# Altium PCB PCB05072018.PcbDoc
Units mm, origin at the board's own origin, x right, y up, seen from the top; angles counter-clockwise.
Board outline 50 x 30 mm, 4 copper layers (Top Layer, L2, L3, Bottom Layer), stack 1.49 mm thick; 46 components, 32 nets, 229 pads, 161 vias.
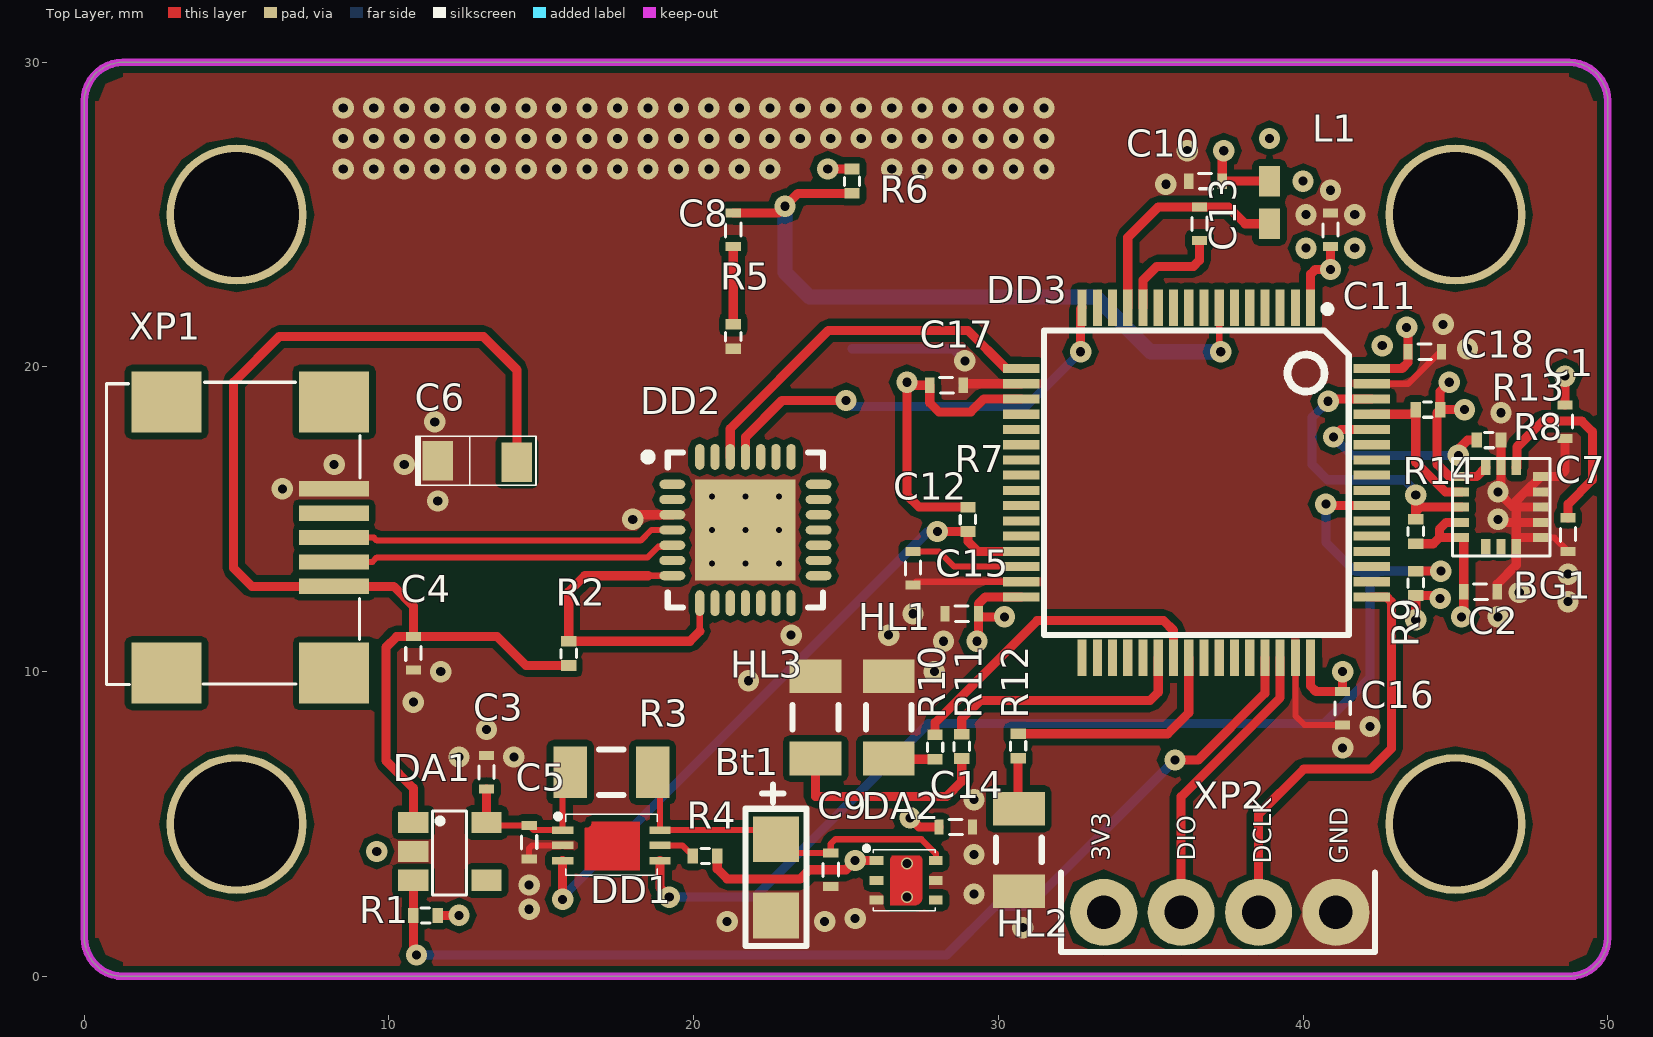
[diagram p0: Top Layer view]
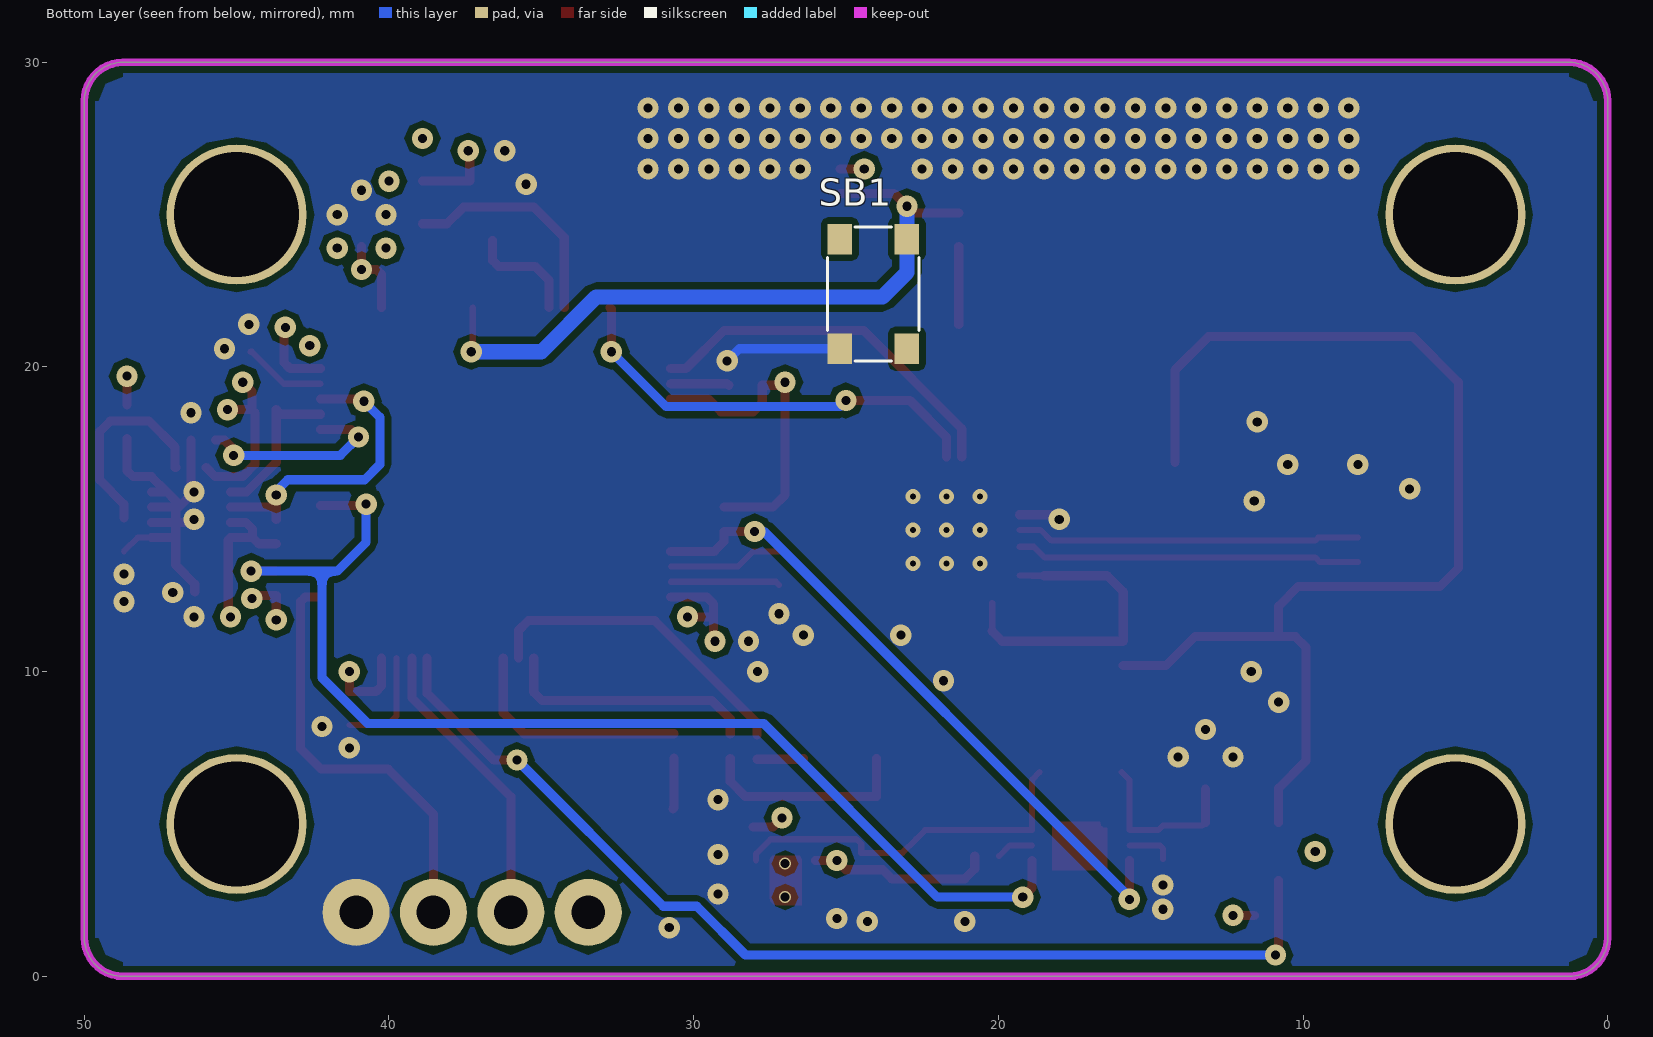
[diagram p1: Bottom Layer view, seen from below]
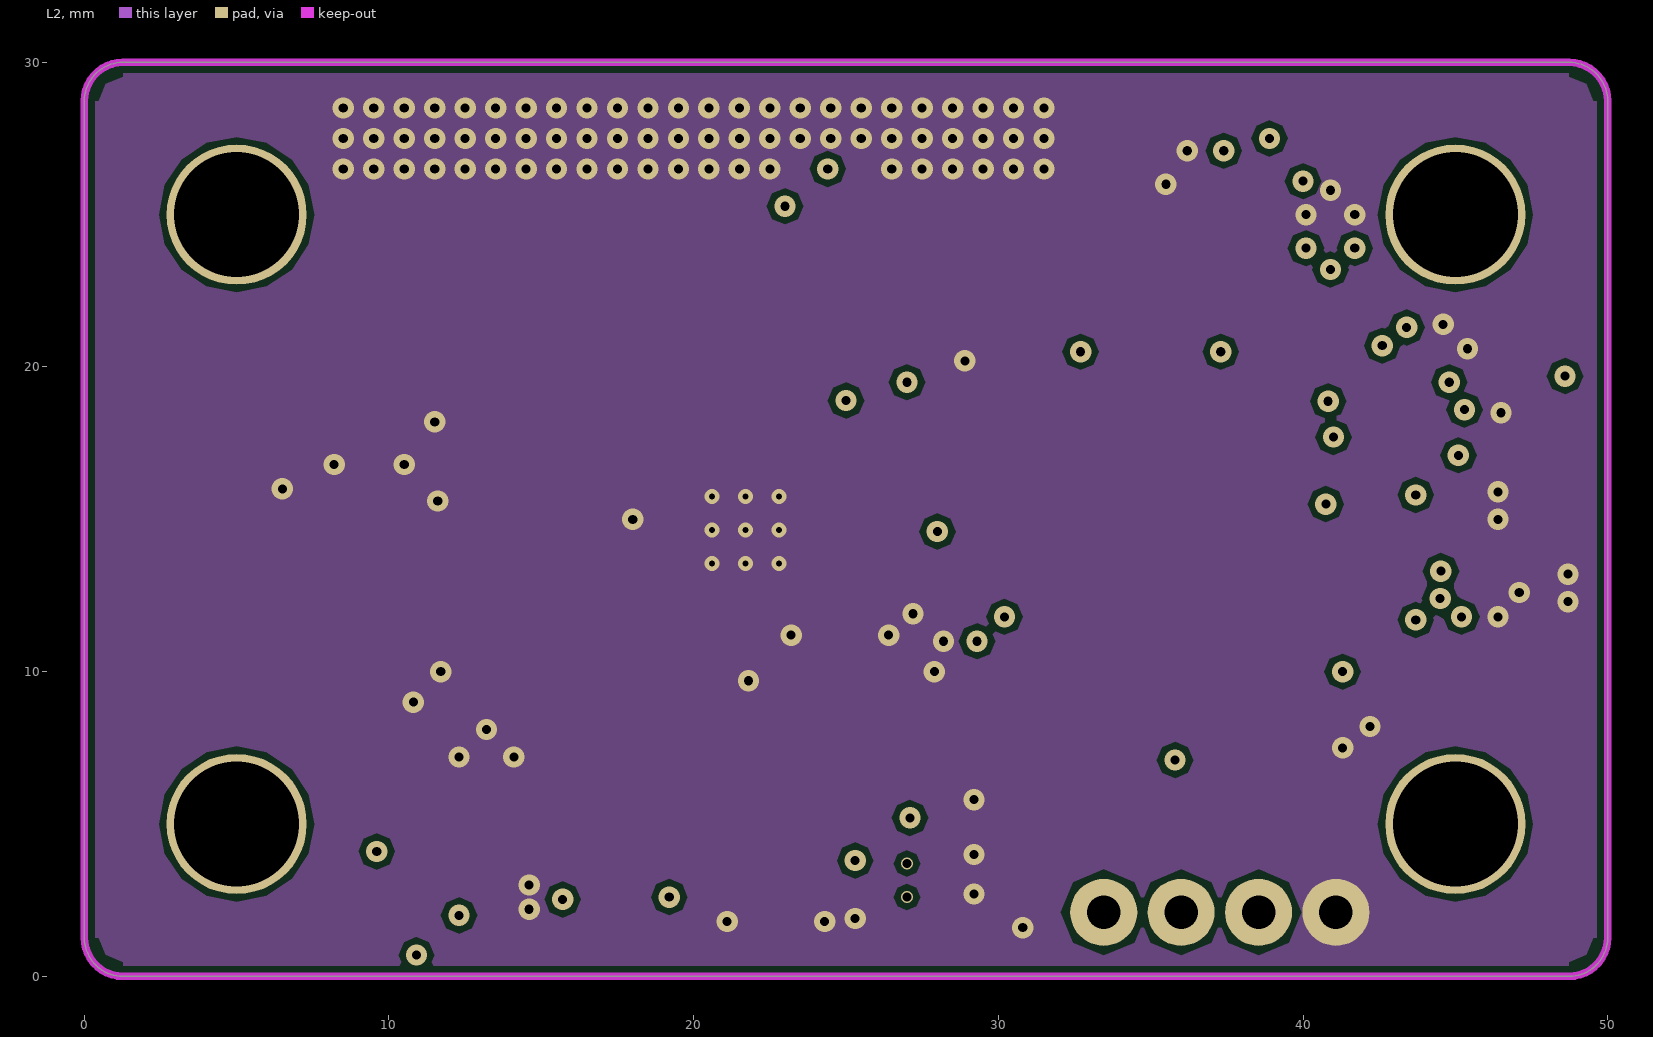
[diagram p2: L2]
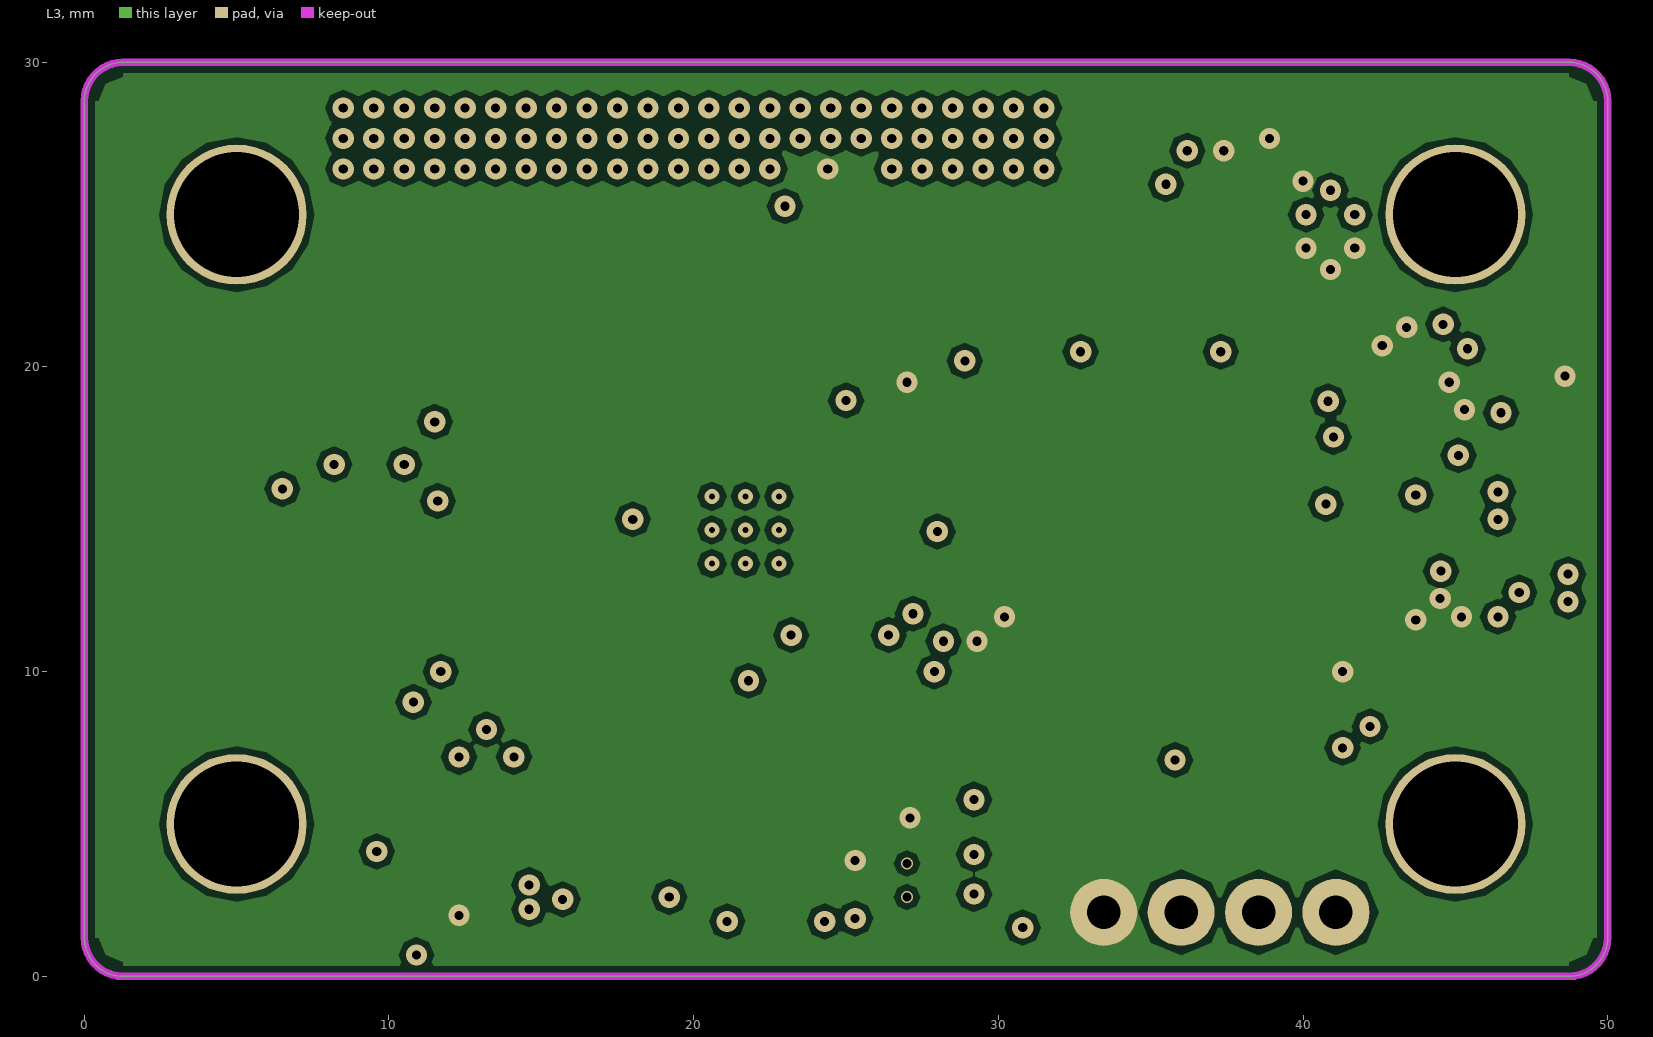
[diagram p3: L3]

## Layer stack, top to bottom
Top Solder: solder mask 0.0102, Solder Resist, Dk 3.5
Top Layer: signal copper 0.035
Dielectric 1: prepreg 0.32, FR-4, Dk 4.2
L2: signal copper 0.035
Dielectric 3: core 0.71, Dk 4.2
L3: signal copper 0.035
Dielectric 2: prepreg 0.32, Dk 4.2
Bottom Layer: signal copper 0.035
Bottom Solder: solder mask 0.0102, Solder Resist, Dk 3.5

## Board outline
1.27,0 cw(c1.27,1.27) 0,1.27 0,28.73 cw(c1.27,28.73) 1.27,30 48.73,30 cw(c48.73,28.73) 50,28.73 50,1.27 cw(c48.73,1.27) 48.73,0

## Design rules (kind name [scope] priority, off if disabled: settings)
Clearance Clearance_other [All] p1: gap=0.2 ignorepadtopadclearanceinfootprint=FALSE except(0.15: Arc-Arc Arc-Track Track-Track)
Clearance Clearance_boardLine [Keepout] p2: gap=0.75 ignorepadtopadclearanceinfootprint=FALSE
DiffPairsRouting [All] p1: maxlimit=0.35 minlimit=0.25 mostfreqgap=0.3 toplayer_minwidth=0.2 toplayer_maxwidth=0.5 toplayer_prefwidth=0.4 midlayer1_minwidth=0.2 midlayer1_maxwidth=0.5 midlayer1_prefwidth=0.4 midlayer2_minwidth=0.2 midlayer2_maxwidth=0.5 midlayer2_prefwidth=0.4 bottomlayer_minwidth=0.2 bottomlayer_maxwidth=0.5 bottomlayer_prefwidth=0.4 maxuncoupledlength=12.7
PlaneConnect PlaneConnect_interayer [InNet('+3.3V')OR InNet('GND')] p1: planeconnectstyle=Direct reliefexpansion=0.508 reliefentries=4 reliefconductorwidth=0.254 reliefairgap=0.254
PolygonConnect [InNet('+3.3V')OR InNet('GND')] p1: connectstyle=Direct reliefconductorwidth=0.254 reliefentries=4 polygonreliefangle="90 Angle" airgapwidth=0.254
RoutingVias [All] p1: holewidth=0.3 width=0.7 viastyle="Through Hole" minholewidth=0.3 minwidth=0.7 maxholewidth=0.3 maxwidth=0.7
SolderMaskExpansion [All] p1: expansion=0.102
Width [All] p1: maxlimit=5 minlimit=0.2 preferedwidth=0.5
28 further rules are at their usual default settings.

## Classes and differential pairs
differential pair USB_DifPair: +D_P -D_M

## Components (designator, comment, footprint, x,y, rotation, side; value= is the part's Value field where it differs from the comment)
BG1 "LSM6DS0" LGA-16 45.2,15.4 r90 top
Bt1 "X5HW" X5HW 22.7,4.5 r270 top value="3,7 В 1200 мАч"
C1 "0.1 uF" CAP0402_min 48.6,18.2 r270 top
C2 "10uF" CAP0402_min 45.825,12.625 r0 top
C3 "1 uF" CAP0402_min 13.2,6.7 r90 top
C4 "0.1 uF" CAP0402_min 10.8,10.6 r270 top
C5 "0.1 uF" CAP0402_min 14.6,4.4 r270 top
C6 "4.7u" "Capasitor Tantal TypeA MIN" 12.9,16.9 r180 top
C7 "0,012uF" CAP0402_min 48.7,14.5 r270 top
C8 "0.1 uF" CAP0402_min 21.3,24.5 r270 top
C9 "4.7u" CAP0402_min 24.5,3.5 r270 top
C10 "0.1 uF" CAP0402_min 36.8,26.1 r180 top
C11 "0.1 uF" CAP0402_min 40.9,24.5 r90 top
C12 "0.1 uF" CAP0402_min 27.2,13.4 r270 top
C13 "0.1 uF" CAP0402_min 36.6,24.7 r270 top
C14 "4.7u" CAP0402_min 28.6,4.9 r0 top
C15 "0.1 uF" CAP0402_min 28.8,11.9 r0 top
C16 "0.1 uF" CAP0402_min 41.3,8.8 r90 top
C17 "0.1 uF" CAP0402_min 28.3,19.4 r0 top
C18 "0.1 uF" CAP0402_min 44,20.5 r0 top
DA1 "MA1555" SOT23-5 10.8,5.05 r270 top
DA2 "TPS78230" WSON-6 26,3.8 r270 top value=3V
DD1 "LTC2941IDC" DFN-6 15.7,4.8 r270 top value=5V
DD2 "CP2102" QFN28 21.7,14.65 r0 top
DD3 "STM32F401RE" LQFP-64 36.5,16.2 r270 top
HL1 "TO-1608BC-MRE" LED1206 26.4,8.5 r90 top value=RED
HL2 "TO-1608BC-PG" LED1206 30.675,4.15 r270 top value=GREEN
HL3 "TO-1608BC-MRE" LED1206 24,8.5 r90 top value=RED
L1 "220u" LQG15HN15NJ 38.9,25.4 r270 top
R1 "10k" 0402 10.8,2 r0 top
R2 "0" 0402 15.9,10.2 r90 top
R3 "0.01" 1206 17.3,6.7 r0 top
R4 "10k" 0402 20.775,3.95 r180 top
R5 "100" 0402 21.3,20.6 r90 top
R6 "4.7k" 0402 25.2,25.7 r90 top
R7 "4.7k" 0402 29,14.6 r90 top
R8 "10k" 0402 46.5,17.6 r180 top
R9 "4.7k" 0402 43.7,13.3 r270 top
R10 "470" 0402 27.925,7.125 r90 top
R11 "470" 0402 28.8,7.15 r90 top
R12 "470" 0402 30.65,7.163 r90 top
R13 "4.7k" 0402 43.7,18.6 r0 top
R14 "4.7k" 0402 43.7,15 r270 top
SB1 "*" IT-1184 24.1,22.4 r90 bottom
XP1 "USB/M-1J" USB/M-1J 8.2,14.4 r90 top
XP2 "DS-1021-1x4" Connector_STKLink 33.46,2.1 r0 top value=100V

## Footprints (in the part's own frame and the unit in brackets; to place one, negate y for a bottom-side part, rotate by r counter-clockwise, add the part's x,y. Pads: shape width x height; smd on the part's side, far side on the other; paste and mask are expansions set on the pad)
0402 [mm]
  rect 0.35x0.5 smd mask+0.07: 1(0,0) 2(0.8,0)
  silkscreen extent 0.25,-0.25 0.54,0.25, body extent -0.1,-0.25 0.9,0.25, height 0.25
1206 [mm]
  rect 1.1x1.7 smd: 1(-1.35,0) 2(1.35,0)
  silkscreen extent -0.4,-0.75 0.4,0.75, body extent -1.55,-0.83 1.55,0.83, height 0.67
CAP0402_min [mm]
  rect 0.3x0.5 smd mask+0.07: 1(-0.55,0) 2(0.55,0)
  silkscreen extent -0.23,-0.25 0.23,0.25, body extent -0.73,-0.25 0.73,0.25, height 0.51
"Capasitor Tantal TypeA MIN" [mm]
  rect 1x1.3 smd: 1(-1.3,0.025) 2(1.3,-0.025)
  silkscreen extent -1.92,-0.83 2.03,0.77, body extent -1.6,-0.83 1.6,0.78, height 1.61
Connector_STKLink [mm]
  round 2.2 hole 1.1: 1(0,0) 2(2.54,0) 3(5.08,0) 4(7.62,0)
  silkscreen extent -1.4,-1.3 8.9,1.3, body extent -1.24,-1.3 8.92,1.24, height 8.54
DFN-6 [mm] "2mmx3mm"
  rect 0.25x0.7 smd: 1(0,0) 2(0.5,0) 3(1,0) 4(1.002,3.194) 5(0.502,3.194) 6(0.002,3.194)
  Top Layer region: -0.25,1.004 1.299,1.004 1.299,2.504 -0.25,2.504
  Top Layer region: -0.25,1.004 1.299,1.004 1.299,0.754 1.299,0.754 -0.051,0.754 -0.051,0.844 -0.058,0.877 -0.076,0.904 -0.076,0.904
  Top Layer region: -0.051,0.729 -0.062,0.732 -0.071,0.739 -0.076,0.749 -0.076,0.76 -0.071,0.77 -0.062,0.777 -0.051,0.78 -0.051,0.78 1.249,0.78 1.259,0.778 1.267,0.772 1.272,0.764 1.274,0.754 1.274,0.754 1.272,0.745 1.267,0.736 1.259,0.731 1.249,0.729 1.249,0.729
  Top Layer region: 1.274,0.754 1.276,0.743 1.283,0.735 1.293,0.73 1.305,0.73 1.315,0.735 1.322,0.743 1.324,0.754 1.324,0.754 1.324,2.504 1.322,2.515 1.315,2.524 1.305,2.529 1.293,2.529 1.283,2.524 1.276,2.515 1.274,2.504 1.274,2.504
  Top Layer region: -0.275,0.975 -0.275,2.504 -0.273,2.515 -0.266,2.524 -0.256,2.529 -0.244,2.529 -0.234,2.524 -0.227,2.515 -0.225,2.504 -0.225,2.504 -0.225,0.975 -0.227,0.964 -0.234,0.955 -0.244,0.95 -0.256,0.95 -0.266,0.955 -0.273,0.964 -0.275,0.975
  Top Layer region: -0.25,2.479 -0.261,2.482 -0.27,2.489 -0.275,2.499 -0.275,2.51 -0.27,2.52 -0.261,2.527 -0.25,2.53 -0.25,2.53 1.299,2.53 1.309,2.528 1.317,2.522 1.322,2.514 1.324,2.504 1.324,2.504 1.322,2.495 1.317,2.486 1.309,2.481 1.299,2.479 1.299,2.479
  Top Layer region: -0.025,0.775 -0.042,0.861 -0.091,0.934 -0.164,0.983 -0.25,1 -0.25,1 -0.261,0.998 -0.27,0.991 -0.275,0.981 -0.275,0.969 -0.27,0.959 -0.261,0.952 -0.25,0.95 -0.25,0.95 -0.183,0.936 -0.127,0.898 -0.089,0.842 -0.075,0.775 -0.075,0.775 -0.076,0.766 -0.076,0.757 -0.076,0.757 -0.075,0.746 -0.069,0.736 -0.059,0.73 -0.048,0.729 -0.037,0.733 -0.029,0.741 -0.026,0.752 -0.026,0.752 -0.025,0.763 -0.025,0.775
  Top Layer region: 1.249,0.729 1.238,0.732 1.229,0.739 1.224,0.749 1.224,0.76 1.229,0.77 1.238,0.777 1.249,0.78 1.249,0.78 1.299,0.78 1.309,0.778 1.317,0.772 1.322,0.764 1.324,0.754 1.324,0.754 1.322,0.745 1.317,0.736 1.309,0.731 1.299,0.729 1.299,0.729
  silkscreen extent -0.53,-0.19 1.48,3.1, body extent -0.52,0.1 1.48,3.1, height 0.8
IT-1184 [mm] "3x3x1.5"
  rect 1x0.8 smd: 1(-1.8,1.1) 2(1.8,1.1) 3(-1.8,-1.1) 4(1.8,-1.1)
  silkscreen extent -2.2,-1.5 2.2,1.5, body extent -2,-1.25 2,1.25, height 1.4
LED1206 [mm]
  rect 1.1x1.7 smd: 1(-1.35,0) 2(1.35,0)
  silkscreen extent -0.4,-0.75 0.4,0.75, body extent -1.6,-0.8 1.6,0.8, height 1.1
LGA-16 [mm]
  rect 0.3x0.5 smd mask+0.075: 1(1,0) 2(0.5,0) 3(0,0) 4(-0.5,0) 5(-1,0) 9(-1,-2.6) 10(-0.5,-2.6) 11(0,-2.6) 12(0.5,-2.6) 13(1,-2.6)
  rect 0.5x0.3 smd mask+0.075: 6(-1.3,-0.8) 7(-1.3,-1.3) 8(-1.3,-1.8) 14(1.3,-1.8) 15(1.3,-1.3) 16(1.3,-0.8)
  silkscreen extent -1.6,-2.9 1.6,0.3, body extent -1.5,-2.8 1.5,0.2, height 1.01
LQFP-64 [mm] "LQFP, 64-Leads, Body 10,30x10,30mm, Pitch 0,50mm, IPC Medium Density"
  rect 1.2x0.3 smd mask+0.075: 1(-5.75,3.75) 2(-5.75,3.25) 3(-5.75,2.75) 4(-5.75,2.25) 5(-5.75,1.75) 6(-5.75,1.25) 7(-5.75,0.75) 8(-5.75,0.25) 9(-5.75,-0.25) 10(-5.75,-0.75) 11(-5.75,-1.25) 12(-5.75,-1.75) 13(-5.75,-2.25) 14(-5.75,-2.75) 15(-5.75,-3.25) 16(-5.75,-3.75) 33(5.75,-3.75) 34(5.75,-3.25) 35(5.75,-2.75) 36(5.75,-2.25) 37(5.75,-1.75) 38(5.75,-1.25) 39(5.75,-0.75) 40(5.75,-0.25) 41(5.75,0.25) 42(5.75,0.75) 43(5.75,1.25) 44(5.75,1.75) 45(5.75,2.25) 46(5.75,2.75) 47(5.75,3.25) 48(5.75,3.75)
  rect 0.3x1.2 smd mask+0.075: 17(-3.75,-5.75) 18(-3.25,-5.75) 19(-2.75,-5.75) 20(-2.25,-5.75) 21(-1.75,-5.75) 22(-1.25,-5.75) 23(-0.75,-5.75) 24(-0.25,-5.75) 25(0.25,-5.75) 26(0.75,-5.75) 27(1.25,-5.75) 28(1.75,-5.75) 29(2.25,-5.75) 30(2.75,-5.75) 31(3.25,-5.75) 32(3.75,-5.75) 49(3.75,5.75) 50(3.25,5.75) 51(2.75,5.75) 52(2.25,5.75) 53(1.75,5.75) 54(1.25,5.75) 55(0.75,5.75) 56(0.25,5.75) 57(-0.25,5.75) 58(-0.75,5.75) 59(-1.25,5.75) 60(-1.75,5.75) 61(-2.25,5.75) 62(-2.75,5.75) 63(-3.25,5.75) 64(-3.75,5.75)
  silkscreen extent -5.8,-5 5,5, body extent -5.89,-5.89 5.89,5.89, height 1.55
LQG15HN15NJ [mm]
  rect 1x0.7 smd: 1(-0.7,0) 2(0.7,0)
  body extent -0.73,-0.25 0.73,0.25, height 0.51
QFN28 [mm] "5x5x0.5mm"
  oval 0.85x0.3 smd: 1(-2.4,1.5) 2(-2.4,1) 3(-2.4,0.5) 4(-2.4,0) 5(-2.4,-0.5) 6(-2.4,-1) 7(-2.4,-1.5) 15(2.4,-1.5) 16(2.4,-1) 17(2.4,-0.5) 18(2.4,0) 19(2.4,0.5) 20(2.4,1) 21(2.4,1.5)
  rect 3.3x3.3 smd: 3(0,0)
  oval 0.3x0.85 smd: 8(-1.5,-2.4) 9(-1,-2.4) 10(-0.5,-2.4) 11(0,-2.4) 12(0.5,-2.4) 13(1,-2.4) 14(1.5,-2.4) 22(1.5,2.4) 23(1,2.4) 24(0.5,2.4) 25(0,2.4) 26(-0.5,2.4) 27(-1,2.4) 28(-1.5,2.4)
  rect 0x0 smd: 29(-0.85,0) 30(-0.35,0) 31(0,0.85) 32(0,0.35) 33(0.85,0) 34(0.35,0) 35(0,-0.85) 36(0,-0.35)
  silkscreen extent -3.32,-2.55 2.55,2.55, body extent -2.5,-2.5 2.5,2.5, height 1
SOT23-5 [mm]
  rect 0.7x1 smd mask+0.05: 1(0,0) 2(0.95,0) 3(1.9,0) 4(1.9,2.4) 5(0,2.4)
  silkscreen extent -0.38,0.63 2.37,1.75, body extent -0.5,-0.05 2.5,2.45, height 1.05
USB/M-1J [mm]
  rect 0.5x2.3 smd mask+0.05: 1(-1.6,0) 2(-0.8,0) 3(0,0) 4(0.8,0) 5(1.6,0)
  rect 2x2.3 smd mask+0.05: -(-4.45,0) -(-4.45,5.5) -(4.45,5.5) -(4.45,0)
  silkscreen extent -4.83,-0.85 5.1,7.47, body extent -4.8,-0.82 5.1,8.42, height 3.93
WSON-6 [mm]
  rect 0.3x0.45 smd mask+0.07: 1(0,0) 2(0.65,0) 3(1.3,0) 4(1.3,1.95) 5(0.65,1.95) 6(0,1.95)
  Top Layer region: -0.062,0.45 -0.107,0.487 -0.162,0.5 -0.162,0.5 -0.162,1.375 -0.146,1.438 -0.1,1.483 -0.037,1.5 -0.037,1.5 1.227,1.5 1.345,1.468 1.431,1.381 1.463,1.262 1.463,1.262 1.462,0.45
  silkscreen extent -0.42,-0.35 1.65,1.92, body extent -0.35,-0.1 1.65,1.92, height 0.8
X5HW [mm]
  rect 1.5x1.5 smd: 1(0,0) 2(2.5,0)
  silkscreen extent -1.8,-1 3.5,1

## Part data
BG1: "IMEMO", Documentation=https://www.st.com/resource/en/datasheet/lsm6ds0.pdf, Part Number=LSM6DS0
C1 C4 C5 C8 C10 C11 C12 C13 C15 C16 C17 C18: library part Capasitor, Manufacturer=TDK, Package=0402, Part Number=C1005X7R1H104KT000F, Voltage=50V, Price=0,15, Quantity=50, ShoppingPlace=http://belchip.by/product/?selected_product=33981
C2: library part Capasitor, Manufacturer="Murata Manufacturing", Package=0402, Part Number=GRM1535C1H100J, Voltage=50V, Price=0,02, Quantity=50, ShoppingPlace=https://www.ru-chipdip.by/product/grm1535c1h100j
C3: library part Capasitor, Manufacturer="Murata Manufacturing", Package=0402, Part Number=GRM155R61A105KE15B, Voltage=10V, Price=0,035, Quantity=50, ShoppingPlace=https://www.ru-chipdip.by/product/grm155r61a105k
C6: library part "Capasitor Electrolit", Manufacturer=China, Package="Type A", Part Namber=TECAP4.7/16VA10, Power=16V, Price=0.16, ShoppingPlace=https://www.ru-chipdip.by/product0/850917081
C7: library part Capasitor, Manufacturer="Murata Manufacturing", Package=0402, Part Number=GRM155R71H123K, Voltage=50V, Price=0,02, Quantity=50, ShoppingPlace=https://www.ru-chipdip.by/product/grm155r71h123k
C9 C14: library part Capasitor, Manufacturer="Murata Manufacturing", Package=0402, Part Number=GRM2165C1H4R7CD01D, Voltage=50V, Price=0,035, Quantity=50, ShoppingPlace=https://www.ru-chipdip.by/product/grm2165c1h4r7c
DA1: library part MAX1555, Manufacturer="Maxim Integrated Products", Package=SOT-23-5, Part Number=MAX1555EZK+T, Price=1, Quantity=1, ShoppingPlace=http://belchip.by/product/?selected_product=06393
DA2: Manufacturer="Texas Instruments", Package=SOT-23-6, Part Number=TSOT23-5, Price=1.58, Quantity=1, ShoppingPlace=https://www.digikey.com/product-detail/en/texas-instruments/TPS78230DDCR/296-24372-2-ND/2051745
DD1: Manufacturer="RoHS Compliant", Package=6-DFN, Part Number=LTC2941IDC, Price=1.58, Quantity=1, ShoppingPlace=https://www.digikey.com/product-detail/en/linear-technology-analog-devices/LTC1754ES6-5-TRMPBF/LTC1754ES6-5-TRMPBFTR-ND/962607
DD2: "USB/USART Converter", Manufacture="Silicon Labs", Documentation=https://www.silabs.com/documents/public/data-sheets/CP2102-9.pdf, Packge=QFN-28, Part Number=CP2102
DD3: Manufacturer="STM MicroElectronics", Documentation=http://www.keil.com/dd/docs/datashts/st/stm32f4xx/dm00102166.pdf, Part Number=STM32F401RE, Price=12, Quantity=1
HL1 HL3: library part LED, Manufacturer="Taiwan Oasis Technology Co", Package=1608, Part Number=TO-1608BC-MRE, Price=0.03, Quantity=10, Shopping Place=https://www.ru-chipdip.by/product/to-1608bc-mre
HL2: library part LED, Manufacturer="Taiwan Oasis Technology", Package=1608, Part Number=TO-1608BC-PG, Price=0.03, Quantity=10, Shopping Place=https://www.ru-chipdip.by/product/to-1608bc-pg
L1: library part Inductor, Manufacturer=Bourns, Package=1812, Part Number=CM453232-221KL, Price=0.225, Quantity=2, ShoppingPlace=https://www.ru-chipdip.by/product/cm453232-221kl
R1 R4 R8: library part Resistor, Manufacturer=Тайвань, Package=0402, Part Number=RC0402FR-0710KL, Power=0.062W, Price=0,015, Quntity=50
R2: library part Resistor, Manufacturer=Тайвань, Package=0402, Part Number=RC0402JR-070RL, Power=0.062W, Price=0.015, Quntity=50, ShoppingPlace=https://www.ru-chipdip.by/product0/9000189662
R3: library part Resistor, Manufacturer=China, Package=1206, Part Number=120600R1, Power=0.75W, Price=4, Quntity=50, ShoppingPlace=https://ru.aliexpress.com/item/Power-Adapter-Chip-Resistors-1206-0-01R-0-01-ohms-R010-100pcs/32834259073.html?spm=a2g0v.search0604.3.249.2a2b60c7NBGyXV&ws_ab_test=searchweb0_0,searchweb201602_3_10152_10151_10065_10344_10068_10342_10343_10340_10341_10696_10084_5722520_10083_5711520_10618_10307_10059_5722620_5722920_5722720_5722820_100031_5711420_10103_524_10624_10623_10622_10621_10620_10125,searchweb201603_6,ppcSwitch_5&algo_expid=fa6d5ed5-cdca-4e44-a6e1-815c4b4f7787-37&algo_pvid=fa6d5ed5-cdca-4e44-a6e1-815c4b4f7787&transAbTest=ae803_2&priceBeautifyAB=0
R5: library part Resistor, Manufacturer=Тайвань, Package=0402, Part Number=RC0603FR-07100RL, Power=0.062W, Price=0.03, Quntity=50, ShoppingPlace=https://www.ru-chipdip.by/product0/9000079616
R6 R7 R9 R13 R14: library part Resistor, Manufacturer=Тайвань, Package=0402, Part Number=RC0402JR-074K7L, Power=0.062W, Price=0.03, Quntity=50, ShoppingPlace=https://www.ru-chipdip.by/product0/9000189640
R10 R11 R12: library part Resistor, Manufacturer=Тайвань, Package=0402, Part Number=RC0805FR-07470RL, Power=0,062W, Price=0,015, Quntity=50, ShoppingPlace=https://www.ru-chipdip.by/product0/9000079478
SB1: library part Button
XP1: library part USB-M-1J, Manufacturer=ESB, Package="ESB 22 SERIES", Part Number=USB/M-1J, Price=2, Quantity=1, ShoppingPlace=http://belchip.by/product/?selected_product=07369
XP2: library part Connector_STKLink, Manufacturer="Ningbo connfly electronic", Package=DS-1021, Part Number=DS-1021-1x4, Price=0,09, Quantity=10, ShoppingPlace=https://www.ru-chipdip.by/product/pls-4
Bt1: Quantity=https://ru.aliexpress.com/item/3-7-1200-Lipo/32852574199.html?spm=a2g0v.search0604.3.181.2111fc08nULavV&ws_ab_test=searchweb0_0%2Csearchweb201602_3_10152_10151_10065_10344_10068_10342_10343_10340_10341_10696_10084_5722520_10083_5711520_10618_10307_10059_5722620_5722920_306_5722720_5722820_100031_5711420_10103_10624_10623_10622_10621_10620_10125%2Csearchweb201603_31%2CppcSwitch_5&algo_expid=a7204690-5c98-48fe-b8bb-b8922ec76835-26&algo_pvid=a7204690-5c98-48fe-b8bb-b8922ec76835&transAbTest=ae803_2&priceBeautifyAB=0

## Free pads (board coordinates)
  round 4.6 hole 4.1: M(5,5) M(5,25) M(45,5) M(45,25)

## Via types
v1: diameter 0.7, hole 0.3, Top Layer to Bottom Layer, tented both sides, 76 vias
v2: diameter 0.7, hole 0.3, Top Layer to Bottom Layer, 74 vias
v3: diameter 0.5, hole 0.2, Top Layer to Bottom Layer, 9 vias
v4: diameter 0.4, hole 0.3, Top Layer to Bottom Layer, tented both sides, 2 vias

## Nets (pads, with @x,y where several pads share a name; then routed paths per layer and width w, separated by ;. In a path a pad name is that pad's centre, name@x,y a point inside that pad or via, vN(x,y) a via of type N, cw(c..) or ccw(c..) an arc to the next point about the centre after c; other vN are vias at no path point)
+3.3V: BG1.1 BG1.4 BG1.5 BG1.16 C1.1 C2.1 C10.1 C11.1 C14.1 C15.2 C16.2 C17.1 C18.1 DA2.1 DD3.1 DD3.19 DD3.32 DD3.48 DD3.64 L1.1 R1.2 R4.1 R6.2 R7.2 R9.2 R13.2 R14.2 XP2.1 | length 46.5
  Top Layer w0.3: R1.2 v1(12.3,2) ; R4.1 20.775,3.525 21.1,3.2 23.5,3.2 23.8,3.5 25,3.5 v1(25.3,3.8) DA2.1 ; v1(24.4,26.5) R6.2 ; v1(27.1,5.2) 27.4,4.9 C14.1 ; R7.2 27.4,15.4 27,15.8 v1(27,19.5) 27.1,19.4 C17.1 27.75,18.825 28.05,18.525 29.1,18.525 29.525,18.95 DD3.19 ; v1(29.3,11) 29.35,11.05 C15.2 ; v1(30.2,11.8) 29.45,11.8 C15.2 ; DD3.32 29.575,12.45 29.35,12.225 C15.2 ; v1(37.4,27.1) 37.35,27.05 C10.1 L1.1 ; DD3.48 40.25,9.525 40.425,9.35 C16.2 v1(41.3,10) ; DD3.1 40.25,23.05 40.4,23.2 v1(40.9,23.2) C11.1 ; DD3.64 43.25,19.95 43.45,20.15 C18.1 43.45,21.25 v1(43.4,21.3) ; v1(43.7,11.7) R9.2 44.4,12.5 v1(44.5,12.4) ; R14.2 44.275,14.2 44.475,14.4 ; v1(44.8,19.5) 44.5,19.2 R13.2 ; v1(45.2,11.8) 45.275,11.875 C2.1 45.275,14.325 BG1.5 44.475,14.4 ; BG1.4 44.7,14.9 44.475,14.675 44.475,14.4 ; v1(45.3,18.6) R13.2 ; BG1.16 45.7,16.4 BG1.1 44.81,16.4 44.4,16.81 44.4,18.5 R13.2 ; C1.1 v1(48.6,19.7)
  other v1: 42.6,20.7 40.1,23.9 41.7,23.9 40,26.1 38.9,27.5
+3.7V: Bt1.1 C9.1 DA2.6 DD1.6 R3.2 | length 12.2
  Top Layer w0.2: R3.2 18.894,6.456 DD1.6 22.402,4.798 Bt1.1 23.15,4.05 C9.1 24.5,4.35 24.65,4.5 27.475,4.5 27.95,4.025 DA2.6
+5VUsb: C4.1 C6.1 DA1.1 R2.1 XP1.1 | length 39.6
  Top Layer w0.3: DA1.1 10.8,6.175 9.9,7.075 9.9,10.8 10.25,11.15 C4.1 ; C6.1 14.2,19.9 13.1,21 6.4,21 4.9,19.5 4.9,13.4 5.5,12.8 XP1.1 10.15,12.8 10.8,12.15 C4.1 ; R2.1 14.5,10.2 13.55,11.15 C4.1
AGND: C13.2 DD3.12 | length 3.7
  Top Layer w0.3: DD3.12 34.75,22.85 35.2,23.3 36.4,23.3 36.6,23.5 C13.2
AVDD: C13.1 DD3.13 L1.2 | length 7.6
  Top Layer w0.3: DD3.13 34.25,24.25 35.25,25.25 C13.1 37.55,25.25 38.1,24.7 L1.2
Battery_Resourse: DD3.39 R10.2 | length 10.6
  Top Layer w0.3: R10.2 27.925,8.325 31.275,11.675 35.425,11.675 35.75,11.35 DD3.39
CHgn: DA1.3 DD3.45 R1.1 | length 35.1
  Top Layer w0.3: DA1.3 R1.1 10.8,0.8 v2(10.9,0.7) ; v2(35.8,7.1) 36.564,7.1 38.75,9.286 DD3.45
  Bottom Layer w0.3: v2(10.9,0.7) 28.3,0.7 29.9,2.3 31,2.3 v2(35.8,7.1)
D_M: DD2.5 XP1.2 | length 11.3
  Top Layer w0.2: XP1.2 9.45,13.6 9.6,13.75 18.489,13.75 18.839,14.1 18.953,14.1 DD2.5@19.3,14.1
D_P: DD2.4 XP1.3 | length 11.3
  Top Layer w0.2: XP1.3 9.5,14.4 9.6,14.3 18.261,14.3 18.611,14.65 18.725,14.65 DD2.4
GND: BG1.8 BG1.9 BG1.10 BG1.11 BG1.12 BG1.13 BG1.15 Bt1.2 C1.2 C2.2 C3.2 C4.2 C5.2 C6.2 C7.2 C9.2 C10.2 C11.2 C12.2 C14.2 C15.1 C16.1 C17.2 C18.2 DA1.2 DA2.3 DA2.5 DD1.2 DD2.3 DD3.18 DD3.31 DD3.47 DD3.63 HL1.2 HL2.2 HL3.2 R5.1 R8.1 SB1.1 XP1.5 XP2.4 | length 32.1
  Top Layer w0.2: C5.2 14.6,4.2 14.7,4.3 DD1.2 ; C12.2 27.3,12.95 DD3.31 ; DD3.47 39.75,8.55 40.05,8.25 C16.1 ; DD3.63 43.45,19.45 44.5,20.5 C18.2 ; BG1.9 48.25,14.4 C7.2
  Top Layer w0.3: v1(18,15) 18.15,15.15 DD2.3@19.3,15.15 ; C17.2 28.9,19.45 DD3.18 ; C2.2 46.375,12.875 47,13.5 BG1.8 BG1.8@47,14.3 ; v1(46.4,15) 46.5,14.9 47,14.9 ; R8.1 BG1.15 46.5,16 v1(46.4,15.9) 46.9,15.4 47,15.4 ; BG1.9 47.1,14.4 BG1.8@47,14.3 ; BG1.10 47.05,14.9 ; BG1.11 47,15.4 ; BG1.12 47.3,15.9 ; C1.2 48.6,16.6 48.4,16.4 BG1.13 47.3,15.9 ; BG1.8@47,14.3 47,14.85 47.05,14.9 ; 47,14.9 47,15.4 ; 47,14.9 47.05,14.9 ; 47,15.4 47,15.6 47.3,15.9
  Bottom Layer w0.3: SB1.1 28.5,20.6 v1(28.9,20.2)
  other v1: 30.8,1.6 21.1,1.8 24.3,1.8 25.3,1.9 14.6,2.2 29.2,2.7 14.6,3 29.2,4 29.2,5.8 12.3,7.2 14.1,7.2 41.3,7.5 13.2,8.1 42.2,8.2 10.8,9 21.8,9.7 11.7,10 27.9,10 28.2,11 23.2,11.2 26.4,11.2 46.4,11.8 27.2,11.9 48.7,12.3 47.1,12.6 48.7,13.2 11.6,15.6 6.5,16 8.2,16.8 10.5,16.8 11.5,18.2 46.5,18.5 45.4,20.6 44.6,21.4 40.1,25 41.7,25 40.9,25.8 35.5,26 36.2,27.1
  other v2: 8.5,26.5 9.5,26.5 10.5,26.5 11.5,26.5 12.5,26.5 13.5,26.5 14.5,26.5 15.5,26.5 16.5,26.5 17.5,26.5 18.5,26.5 19.5,26.5 20.5,26.5 21.5,26.5 22.5,26.5 26.5,26.5 27.5,26.5 28.5,26.5 29.5,26.5 30.5,26.5 31.5,26.5 8.5,27.5 9.5,27.5 10.5,27.5 11.5,27.5 12.5,27.5 13.5,27.5 14.5,27.5 15.5,27.5 16.5,27.5 17.5,27.5 18.5,27.5 19.5,27.5 20.5,27.5 21.5,27.5 22.5,27.5 23.5,27.5 24.5,27.5 25.5,27.5 26.5,27.5 27.5,27.5 28.5,27.5 29.5,27.5 30.5,27.5 31.5,27.5 8.5,28.5 9.5,28.5 10.5,28.5 11.5,28.5 12.5,28.5 13.5,28.5 14.5,28.5 15.5,28.5 16.5,28.5 17.5,28.5 18.5,28.5 19.5,28.5 20.5,28.5 21.5,28.5 22.5,28.5 23.5,28.5 24.5,28.5 25.5,28.5 26.5,28.5 27.5,28.5 28.5,28.5 29.5,28.5 30.5,28.5 31.5,28.5
  other v3: 20.6,13.55 21.7,13.55 22.8,13.55 20.6,14.65 21.7,14.65 22.8,14.65 20.6,15.75 21.7,15.75 22.8,15.75
INT_LSM6: BG1.7
LED_Power_ON: DD3.40 R12.2 | length 7.7
  Top Layer w0.3: R12.2 35.563,7.963 36.25,8.65 DD3.40
NetBG1_14: BG1.14 C7.1 | length 6.8
  Top Layer w0.3: BG1.14 47.025,16.7 47.025,17.375 47.875,18.225 49.15,18.225 49.5,17.875 49.5,16.3 48.7,15.5 C7.1
NetC3_1: C3.1 C5.1 DA1.5 DD1.1 R3.1 | length 5.7
  Top Layer w0.2: DA1.5 13.3,4.95 C5.1 14.75,4.8 DD1.1 15.7,6.45 R3.1
  Top Layer w0.3: DA1.5 C3.1
NetC8_2: C8.2 R5.2 | length 2.6
  Top Layer w0.3: R5.2 C8.2
NetC12_1: C12.1 DD3.30 | length 3.8
  Top Layer w0.2: C12.1 28.05,13.95 28.55,13.45 DD3.30
NetDD1_5: DD1.5 R4.2 | length 1.2
  Top Layer w0.2: DD1.5 19.627,4.298 R4.2
NetDD2_7: DD2.7 DD2.8 R2.2 | length 10.6
  Top Layer w0.2: 18.5,13.15 DD2.7 ; 20.2,11.325 DD2.8
  Top Layer w0.3: 18.5,13.15 16.425,13.15 15.9,12.625 R2.2 19.875,11 20.2,11.325
NetDD3_60: DD3.60 R8.2 | length 6.7
  Top Layer w0.3: v1(41,17.7) 41.25,17.95 DD3.60 ; v1(45.1,17.1) 45,17.2 45.4,17.6 R8.2
  Bottom Layer w0.3: v1(41,17.7) 41.6,17.1 v1(45.1,17.1)
NetHL1_1: HL1.1 R10.1 | length 1.5
  Top Layer w0.3: HL1.1 26.425,7.125 R10.1
NetHL2_1: HL2.1 R12.1 | length 1.7
  Top Layer w0.3: R12.1 30.65,5.525 HL2.1
NetHL3_1: HL3.1 R11.1 | length 7
  Top Layer w0.3: HL3.1 24,5.9 28.3,5.9 28.8,6.4 R11.1
RESET: C8.1 DD3.7 R6.1 SB1.4 | length 23.2
  Top Layer w0.2: DD3.7 37.25,20.55 v2(37.3,20.5)
  Top Layer w0.3: C8.1 22.775,25.05 v1(23,25.275) 23.425,25.7 R6.1
  Bottom Layer w0.5: v1(23,25.275) SB1.4 23,23.1 23.8,22.3 33.2,22.3 35,20.5 v2(37.3,20.5)
SCL_Bat: DD1.3 DD3.29 R7.1 | length 21.8
  Top Layer w0.3: v1(15.7,2.525) DD1.3 ; v1(28,14.6) R7.1 29,14.275 29.325,13.95 DD3.29
  Bottom Layer w0.3: v1(15.7,2.525) 15.7,2.61 27.69,14.6 v1(28,14.6)
SCL_Sensor: BG1.2 DD3.61 R13.1 | length 5.1
  Top Layer w0.3: DD3.61 43.55,18.45 R13.1 43.7,16.874 44.674,15.9 BG1.2
SDA_Bat: DD1.4 DD3.55 R9.1 | length 38.6
  Top Layer w0.3: DD1.4 18.894,2.906 v1(19.2,2.6) ; v1(40.75,15.5) 40.8,15.45 DD3.55 ; R9.1 v1(44.525,13.3)
  Bottom Layer w0.3: v1(19.2,2.6) 22,2.6 27.7,8.3 40.7,8.3 42.2,9.8 42.2,13.3 ; v1(40.75,15.5) 40.75,14.25 41.7,13.3 42.2,13.3 ; v1(44.525,13.3) 42.2,13.3
SDA_Sensor: BG1.3 DD3.62 R14.1 | length 10.3
  Top Layer w0.3: v1(40.825,18.875) 40.825,18.75 41.025,18.95 DD3.62 ; R14.1 43.7,15.25 ; v1(43.7,15.8) 43.7,15.875 43.7,15.25 ; BG1.3 43.85,15.4 43.7,15.25
  Bottom Layer w0.3: v1(40.825,18.875) 40.3,18.35 40.3,16.8 40.8,16.3 43.325,16.3 43.7,15.925 v1(43.7,15.8)
SWCLK: DD3.49 XP2.3 | length 14
  Top Layer w0.3: XP2.3 38.54,5.315 40.025,6.8 42.225,6.8 42.9,7.475 42.9,12.3 42.75,12.45 DD3.49
SWDIO: DD3.46 XP2.2 | length 9.7
  Top Layer w0.3: XP2.2 36,5.9 39.25,9.15 DD3.46
Transmit_Data: DD3.38 R11.2 | length 8.4
  Top Layer w0.3: R11.2 28.8,8.45 29.4,9.05 34.975,9.05 35.25,9.325 DD3.38
USART1_RxD: DD2.25 DD3.16 | length 14.4
  Top Layer w0.3: DD2.25 21.7,17.7 22.9,18.9 v2(25,18.9) ; v2(32.7,20.5) 32.7,21.9 DD3.16
  Bottom Layer w0.3: v2(25,18.9) 25.2,18.7 30.9,18.7 v2(32.7,20.5)
USART1_TxD: DD2.26 DD3.17 | length 12.3
  Top Layer w0.3: DD2.26 21.2,17.975 24.425,21.2 29,21.2 30.25,19.95 DD3.17
pads on no net: BG1.6 DA1.4 DA2.2 DA2.4 DD2.1 DD2.2 DD2.6 DD2.9 DD2.10 DD2.11 DD2.12 DD2.13 DD2.14 DD2.15 DD2.16 DD2.17 DD2.18 DD2.19 DD2.20 DD2.21 DD2.22 DD2.23 DD2.24 DD2.27 DD2.28 DD2.29 DD2.30 DD2.31 DD2.32 DD2.33 DD2.34 DD2.35 DD2.36 DD3.2 DD3.3 DD3.4 DD3.5 DD3.6 DD3.8 DD3.9 DD3.10 DD3.11 DD3.14 DD3.15 DD3.20 DD3.21 DD3.22 DD3.23 DD3.24 DD3.25 DD3.26 DD3.27 DD3.28 DD3.33 DD3.34 DD3.35 DD3.36 DD3.37 DD3.41 DD3.42 DD3.43 DD3.44 DD3.50 DD3.51 DD3.52 DD3.53 DD3.54 DD3.56 DD3.57 DD3.58 DD3.59 SB1.2 SB1.3 XP1.4 XP1.-
copper on no net:
  other v1: 9.6,4.1
  other v4: 27,2.6 27,3.7

## Polygon pours and split planes (outlines as drawn)
+3.3V on L3 "Top Overlay-No Net" (solid, remove dead copper, pour order 16): -0.021,29.979 49.979,29.979 49.979,-0.021 -0.021,-0.021
GND on L2 "Top Overlay-No Net" (solid, remove dead copper, pour order 14): -0.007,30.023 49.993,30.023 49.993,0.023 -0.007,0.023
GND on Top Layer "Top Overlay-No Net" (solid, remove dead copper, pour order 18): 0,0 0,30 50,30 50,0
GND on Bottom Layer "Top Overlay-No Net" (solid, remove dead copper, pour order 20): 0,30 0,0 50,0 50,30

## Keep-outs
Keep-Out Layer:
  lines w0.254: 0,1.27 ccw(c1.27,1.27) 1.27,0 2.5,0 47.5,0 48.73,0 ccw(c48.73,1.27) 50,1.27 50,2.5 50,27.5 50,28.73 ccw(c48.73,28.73) 48.73,30 47.5,30 2.5,30 1.27,30 ccw(c1.27,28.73) 0,28.73 0,27.5 0,2.5 0,1.27

## Silkscreen, mask and mechanical layers (free items; w line width, h text height)
Bottom Paste:
  lines w0.254: 0,1.27 ccw(c1.27,1.27) 1.27,0 2.5,0 47.5,0 48.73,0 ccw(c48.73,1.27) 50,1.27 50,2.5 50,27.5 50,28.73 ccw(c48.73,28.73) 48.73,30 47.5,30 2.5,30 1.27,30 ccw(c1.27,28.73) 0,28.73 0,27.5 0,2.5 0,1.27
Board:
  lines w0.254: 0,1.27 ccw(c1.27,1.27) 1.27,0 2.5,0 47.5,0 48.73,0 ccw(c48.73,1.27) 50,1.27 50,2.5 50,27.5 50,28.73 ccw(c48.73,28.73) 48.73,30 47.5,30 2.5,30 1.27,30 ccw(c1.27,28.73) 0,28.73 0,27.5 0,2.5 0,1.27

## Text inside footprints (layer, text, board x,y; h text height)
XP2: Top Overlay "3V3" at 33.86,3.8 h1 r90; Top Overlay "DIO" at 36.66,3.8 h1 r90; Top Overlay "DCLK" at 39.16,3.7 h1 r90; Top Overlay "GND" at 41.66,3.7 h1 r90